# Altium PCB sdl_adapter.PcbDoc
Units mil, origin at the board's own origin, x right, y up, seen from the top; angles counter-clockwise.
Board outline 1600 x 550 mil, 2 copper layers (Top Layer, Bottom Layer); 6 components, 12 nets, 40 pads, 17 vias.
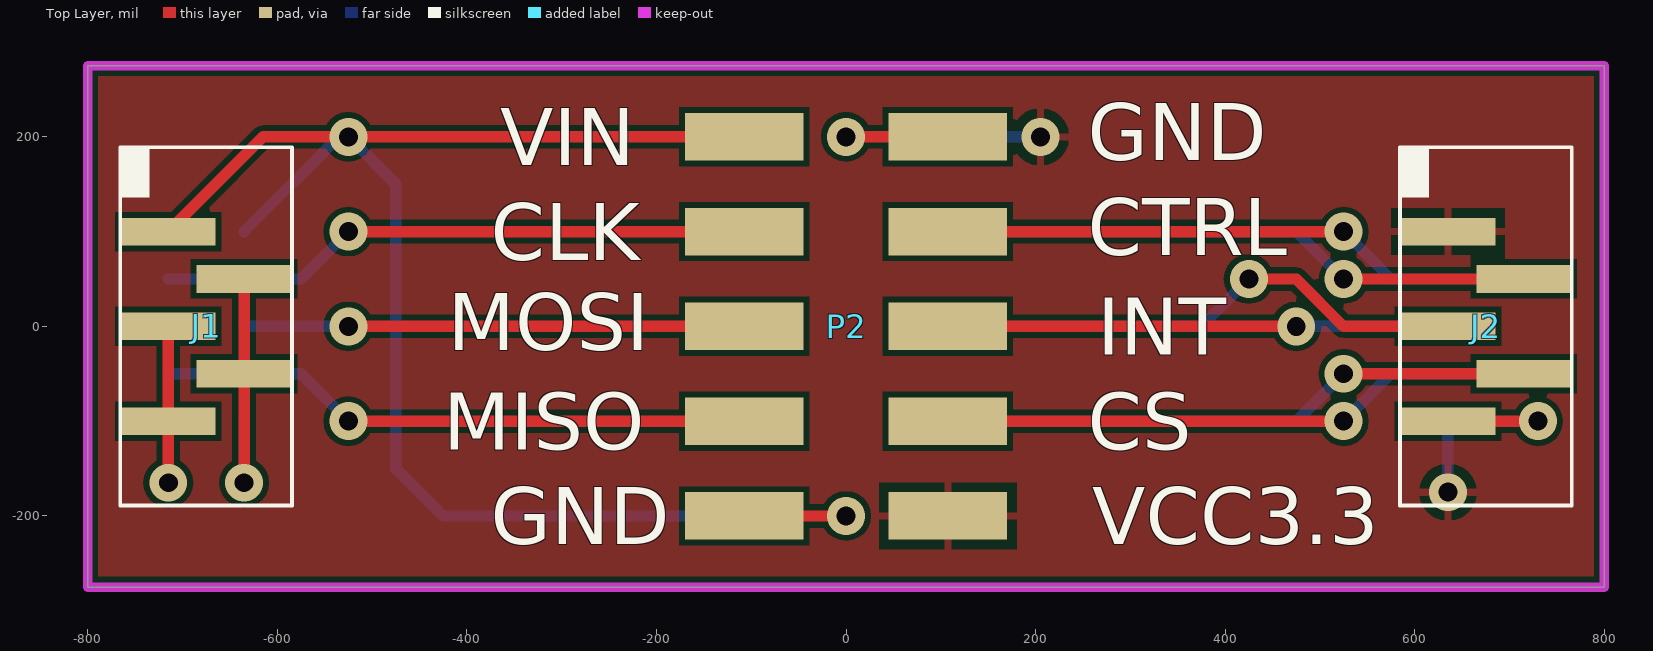
[diagram p0: Top Layer view]
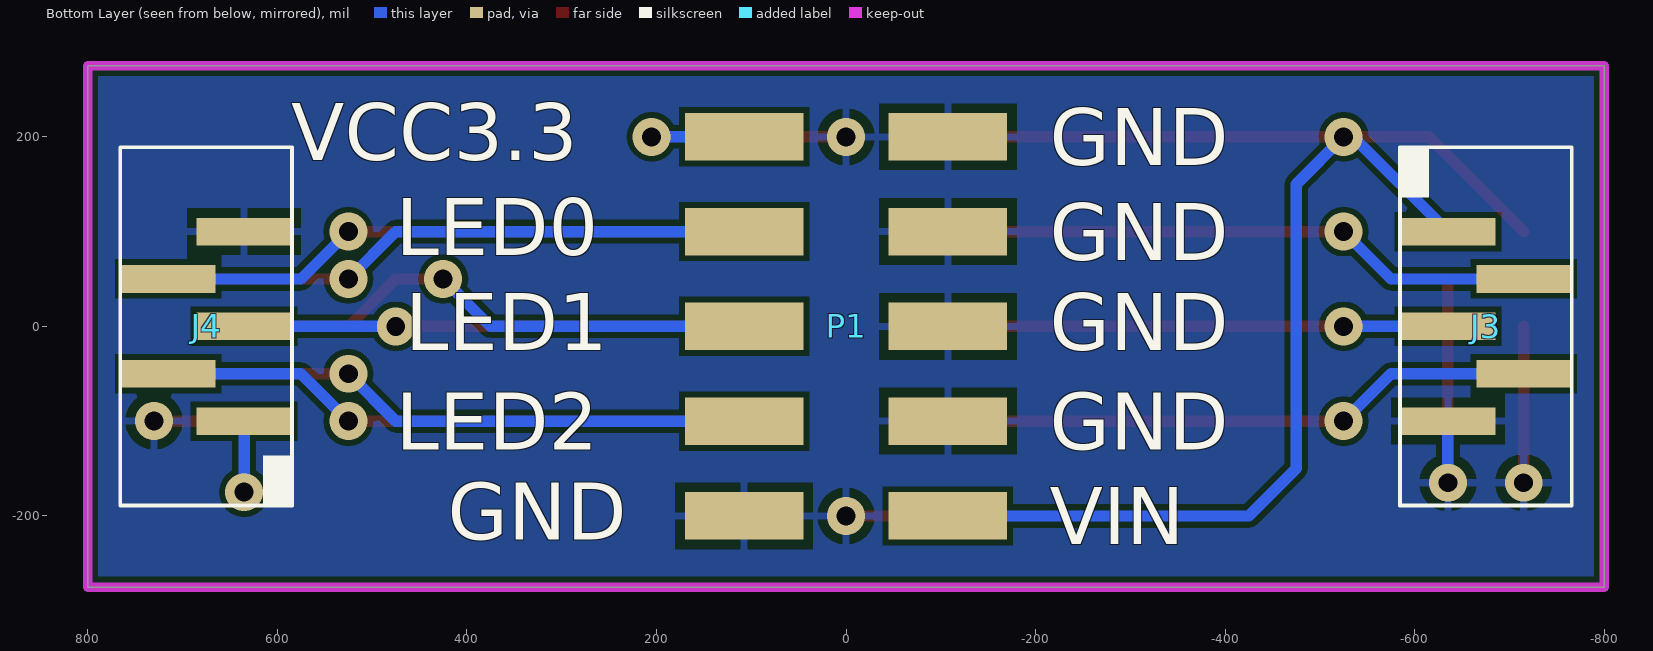
[diagram p1: Bottom Layer view, seen from below]

## Layer stack, top to bottom
Top Solder: solder mask 0.4, Solder Resist, Dk 3.5
Top Layer: signal copper 1.4
Dielectric 1: dielectric 12.6, FR-4, Dk 4.8
Bottom Layer: signal copper 1.4
Bottom Solder: solder mask 0.4, Solder Resist, Dk 3.5

## Board outline
-800,-275 -800,275 800,275 800,-275

## Design rules (kind name [scope] priority, off if disabled: settings)
Clearance "Clearance~Sunstone Circuits" [All] p1: gap=6 // Sunstone Circuits Minimum Clearance Rule (Double Sided)
HoleSize "HoleSize~Sunstone Circuits" [All] p1: absolutevalues=TRUE maxlimit=251 minlimit=16 maxpercent=80.000 minpercent=20.000 // SSC Hole Size Rule For Single Sided & Double Sided Designs.
HoleSize Testpoint [All] p2: absolutevalues=TRUE maxlimit=100 minlimit=1 maxpercent=80.000 minpercent=20.000
HoleSize TestPointUsage [All] p3: absolutevalues=TRUE maxlimit=100 minlimit=1 maxpercent=80.000 minpercent=20.000
MinimumAnnularRing "MinimumAnnularRing~Sunstone Circuits" [All] p1: minimumring=7 // Sunstone Circuits Minimum Annular Ring (Double Sided)
PlaneClearance "PlaneClearance~Sunstone Circuits" [All] p1: clearance=12 // Sunstone Circuits Power Plane Clearance Rule (Double Sided)
PlaneConnect "PlaneConnect~Sunstone Circuits" [All] p1: planeconnectstyle=Relief reliefexpansion=10 reliefentries=4 reliefconductorwidth=8 reliefairgap=10 // Sunstone Circuits Power Plane Connect Rule (Double Sided)
PolygonConnect "PolygonConnect~Sunstone Circuits" [All] p1: connectstyle=Relief reliefconductorwidth=8 reliefentries=4 polygonreliefangle="90 Angle" airgapwidth=10 // Sunstone Circuits Polygon Connect Style (Double Sided)
RoomDefinition sdl_adapter [InComponentClass('sdl_adapter')] p1: confinementstyle=ConfineIn formatcopy=TRUE lockcomponents=FALSE outline -777.96,-200.94 -777.96,200.94 -183,200.94 -183,260 183,260 183,200.94 777.96,200.94 777.96,-200.94 183,-200.94 183,-260 -183,-260 -183,-200.94
RoutingVias "RoutingVias~Sunstone Circuits" [All] p1: holewidth=16 width=30 viastyle="Through Hole" minholewidth=16 minwidth=30 maxholewidth=20 maxwidth=40 // Sunstone Circuits Routing Vias Rule (Double Sided)
ShortCircuit "ShortCircuit~Sunstone Circuits" [All] p1: allowed=FALSE // Sunstone Circuits Short Circuit Rule~Do Not Allow (Double Sided)
SolderMaskExpansion TentVia [isvia] p1: expansion=-20 // Sunstone Circuits Solder Mask Expansion Rule (Double Sided)
SolderMaskExpansion "SolderMaskExpansion~Sunstone Circuits" [All] p2: expansion=3 // Sunstone Circuits Solder Mask Expansion Rule (Double Sided)
ViasUnderSMD "ViasUnderSMD~Sunstone Circuits" [All] p1: allowed=FALSE // Sunstone Circuits Vias Under SMD~Do Not Allow (Double Sided)
Width "Width~Sunstone Circuits" [All] p1: maxlimit=100 minlimit=6 preferedwidth=10 // Sunstone Circuits Minimum Width Rule (Double Sided)
25 further rules are at their usual default settings.

## Components (designator, comment, footprint, x,y, rotation, side; value= is the part's Value field where it differs from the comment)
J1 "Samtec connector" TFM-105-02-L-S -675,0 r90 top
J2 "Samtec connector" TFM-105-02-L-S 675,0 r90 top
J3 "Samtec connector" TFM-105-02-L-S -675,0 r90 bottom
J4 "Samtec connector" TFM-105-02-L-S 675,0 r270 bottom
P1 "2 x 5 header SMD" "2x5 header SMD" 0,0 r90 bottom
P2 "2 x 5 header SMD" "2x5 header SMD" 0,0 r270 top

## Footprints (in the part's own frame and the unit in brackets; to place one, negate y for a bottom-side part, rotate by r counter-clockwise, add the part's x,y. Pads: shape width x height; smd on the part's side, far side on the other; paste and mask are expansions set on the pad)
"2x5 header SMD" [mil] "100 mils header, SMD"
  rect 50x125 smd: 1(-200,-107.5) 2(-200,107.5) 3(-100,-107.5) 4(-100,107.5) 5(0,-107.5) 6(0,107.5) 7(100,-107.5) 8(100,107.5) 9(200,-107.5) 10(200,107.5)
  body extent -250,-135 250,135, height 382
TFM-105-02-L-S [mm] "Samtec TFM, single row, 5 pos"
  rect 0.74x2.54 smd: 1(2.54,1.015) 2(1.27,-1.015) 3(0,1.015) 4(-1.27,-1.015) 5(-2.54,1.015)
  silkscreen extent -4.8,-2.3 4.83,2.33, body extent -4.8,-2.3 4.8,2.3, height 5.59

## Part data
J1 J2 J3 J4: library part "Samtec conntector", "Samtec connector, 1.27 mm, single row, 5 pos SMD"
P1 P2: "2x5 100 mil header SMD"

## Via types
v1: diameter 40, hole 20, Top Layer to Bottom Layer, 17 vias

## Nets (pads, with @x,y where several pads share a name; then routed paths per layer and width w, separated by ;. In a path a pad name is that pad's centre, name@x,y a point inside that pad or via, vN(x,y) a via of type N, cw(c..) or ccw(c..) an arc to the next point about the centre after c; other vN are vias at no path point)
GND: J1.2 J1.3 J1.4 J1.5 J2.5 J3.5 J4.5 P1.2 P1.3 P1.5 P1.7 P1.9 P2.2 P2.9 | length 755
  Top Layer w12: v1(-715,-165) v1(-715,-165) J1.5 J1.3 ; J1.2 J1.4 v1(-635,-165) v1(-635,-165) ; P2.9 v1(0,-200) ; v1(0,200) P2.2 ; J2.5 v1(730,-100)
  Bottom Layer w12: J3.5 v1(-635,-165) v1(-635,-165)
LED_DRIVE0: J2.2 P1.8 | length 628.2
  Top Layer w12: v1(525,50) J2.2
  Bottom Layer w12: P1.8 475,100 v1(525,50)
LED_DRIVE1: J2.3 P1.6 | length 569
  Top Layer w12: v1(425,50) 475,50 525,0 J2.3
  Bottom Layer w12: P1.6 375,0 v1(425,50)
LED_DRIVE2: J2.4 P1.4 | length 635.7
  Top Layer w12: v1(525,-50) J2.4
  Bottom Layer w12: P1.4@100,-100 475,-100 v1(525,-50)
NETWORK_CS: J4.2 P2.8 | length 628.2
  Top Layer w12: P2.8 v1(525,-100)
  Bottom Layer w12: v1(525,-100) 575,-50 J4.2
NETWORK_CTRL: J4.4 P2.4 | length 628.2
  Top Layer w12: P2.4 v1(525,100)
  Bottom Layer w12: v1(525,100) 575,50 J4.4
NETWORK_INT: J4.3 P2.6 | length 527.5
  Top Layer w12: P2.6 v1(475,0)
  Bottom Layer w12: v1(475,0) J4.3
SPI_CLK: J3.2 P2.3 | length 628.2
  Top Layer w12: v1(-525,100) P2.3
  Bottom Layer w12: J3.2 -575,50 v1(-525,100)
SPI_MISO: J3.4 P2.7 | length 628.2
  Top Layer w12: v1(-525,-100) P2.7
  Bottom Layer w12: J3.4 -575,-50 v1(-525,-100)
SPI_MOSI: J3.3 P2.5 | length 527.5
  Top Layer w12: v1(-525,0) P2.5
  Bottom Layer w12: J3.3 v1(-525,0)
VCC3.3: J2.1 J4.1 P1.10 P2.10 | length 172.5
  Bottom Layer w12: P1.10 v1(205,200) ; v1(635.04,-174.96) J4.1
VIN: J1.1 J3.1 P1.1 P2.1 | length 1559.3
  Top Layer w12: J1.1 -614.96,200 v1(-525,200) P2.1
  Bottom Layer w12: J3.1 -535.04,200 v1(-525,200) -475,150 -475,-150 -425,-200 P1.1

## Polygon pours and split planes (outlines as drawn)
GND on Bottom Layer "Bottom Layer-No Net" (solid, pour order 2): -800,275 -800,-275 800,-275 800,275
VCC3.3 on Top Layer "Bottom Layer-No Net" (solid, pour order 4): -800,275 -800,-275 800,-275 800,275

## Keep-outs
Keep-Out Layer:
  the board outline again, w10

## Silkscreen, mask and mechanical layers (free items; w line width, h text height)
Top Overlay:
  text "GND" at 255,175 h60
  text "VIN" at -365,170 h60
  text "CTRL" at 255,75 h60
  text "CLK" at -375,70 h60
  text "MOSI" at -420,-25 h60
  text "INT" at 265,-30 h60
  text "MISO" at -425,-130 h60
  text "CS" at 255,-130 h60
  text "GND" at -375,-230 h60
  text "VCC3.3" at 260,-230 h60
Bottom Overlay:
  text "VCC3.3" at 585,175 h60
  text "GND" at -215,170 h60
  text "LED0" at 475,75 h60
  text "GND" at -215,70 h60
  text "GND" at -215,-25 h60
  text "LED1" at 465,-25 h60
  text "GND" at -215,-130 h60
  text "LED2" at 475,-130 h60
  text "GND" at 420,-225 h60
  text "VIN" at -215,-230 h60